# Altium PCB ha_sensor.PcbDoc
Units mm, origin at the board's own origin, x right, y up, seen from the top; angles counter-clockwise.
Board outline 65 x 45 mm, 4 copper layers (Top Layer, Int1 (GND), Int2 (PWR), Bottom Layer), stack 1.585 mm thick; 59 components, 30 nets, 141 pads, 36 vias.
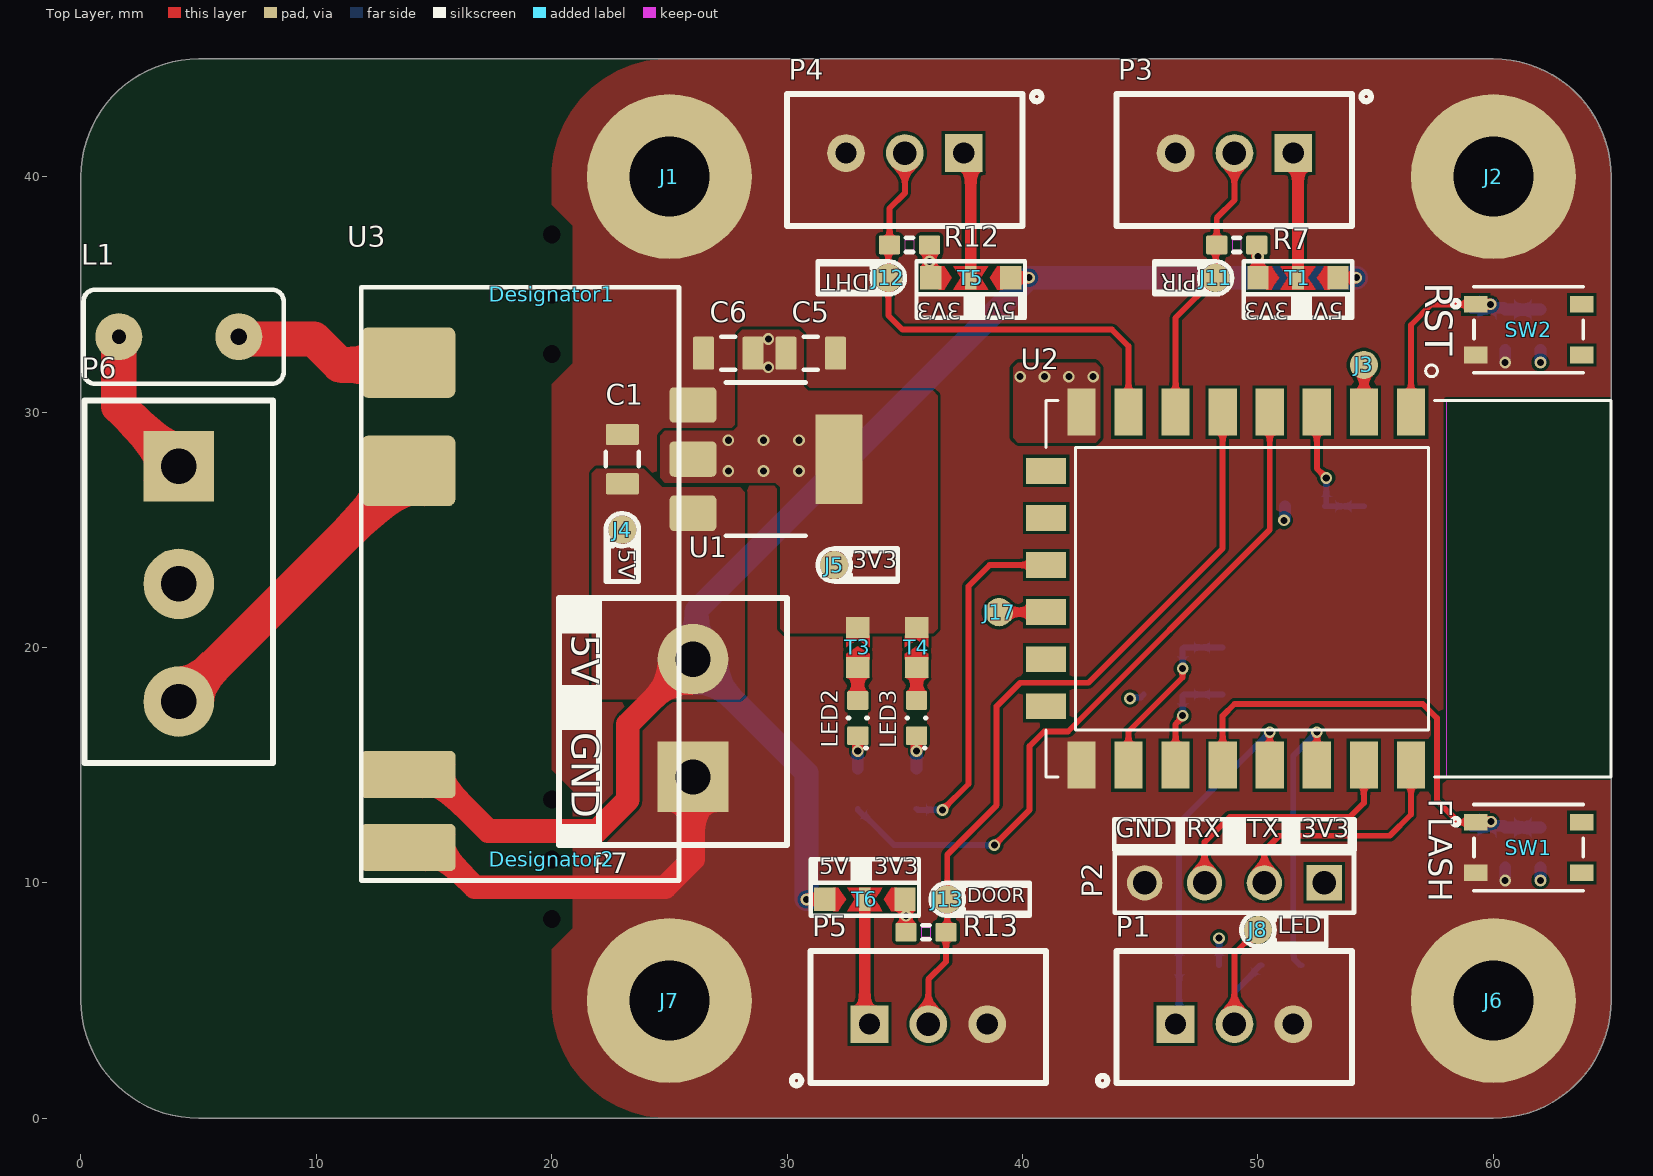
[diagram p0: Top Layer view]
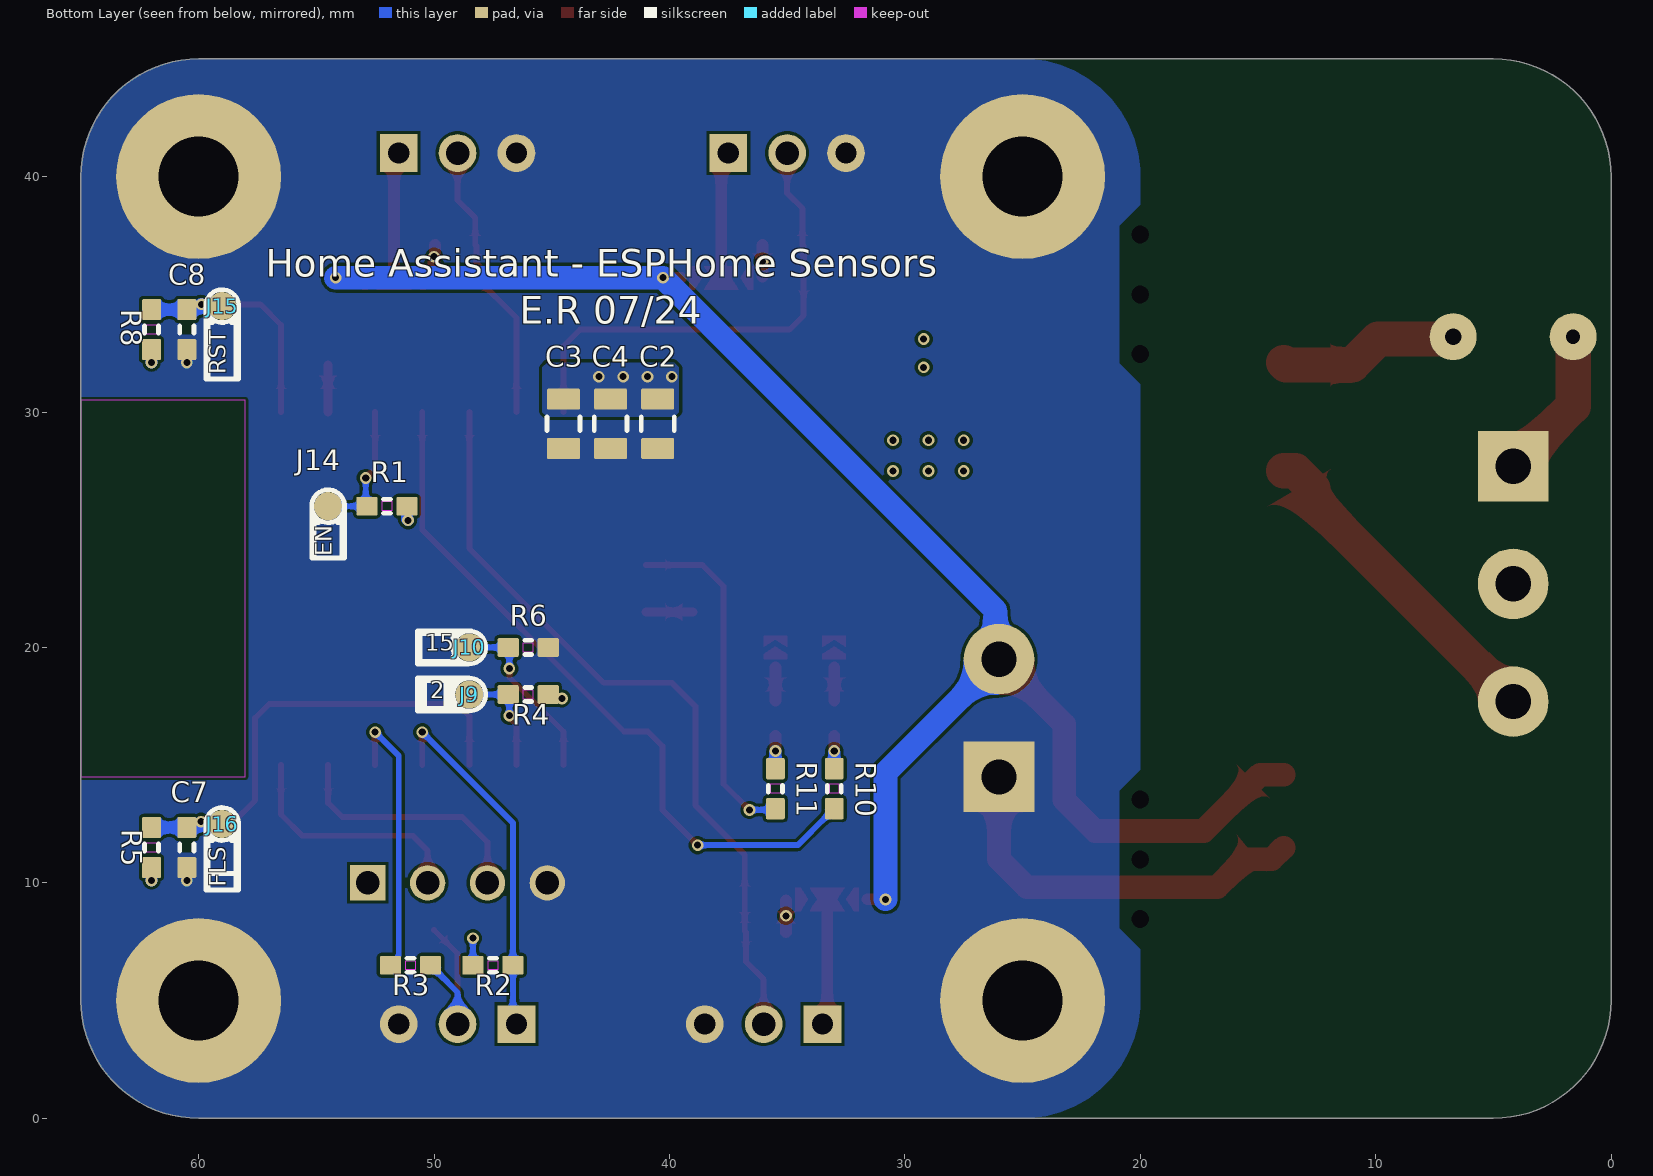
[diagram p1: Bottom Layer view, seen from below]
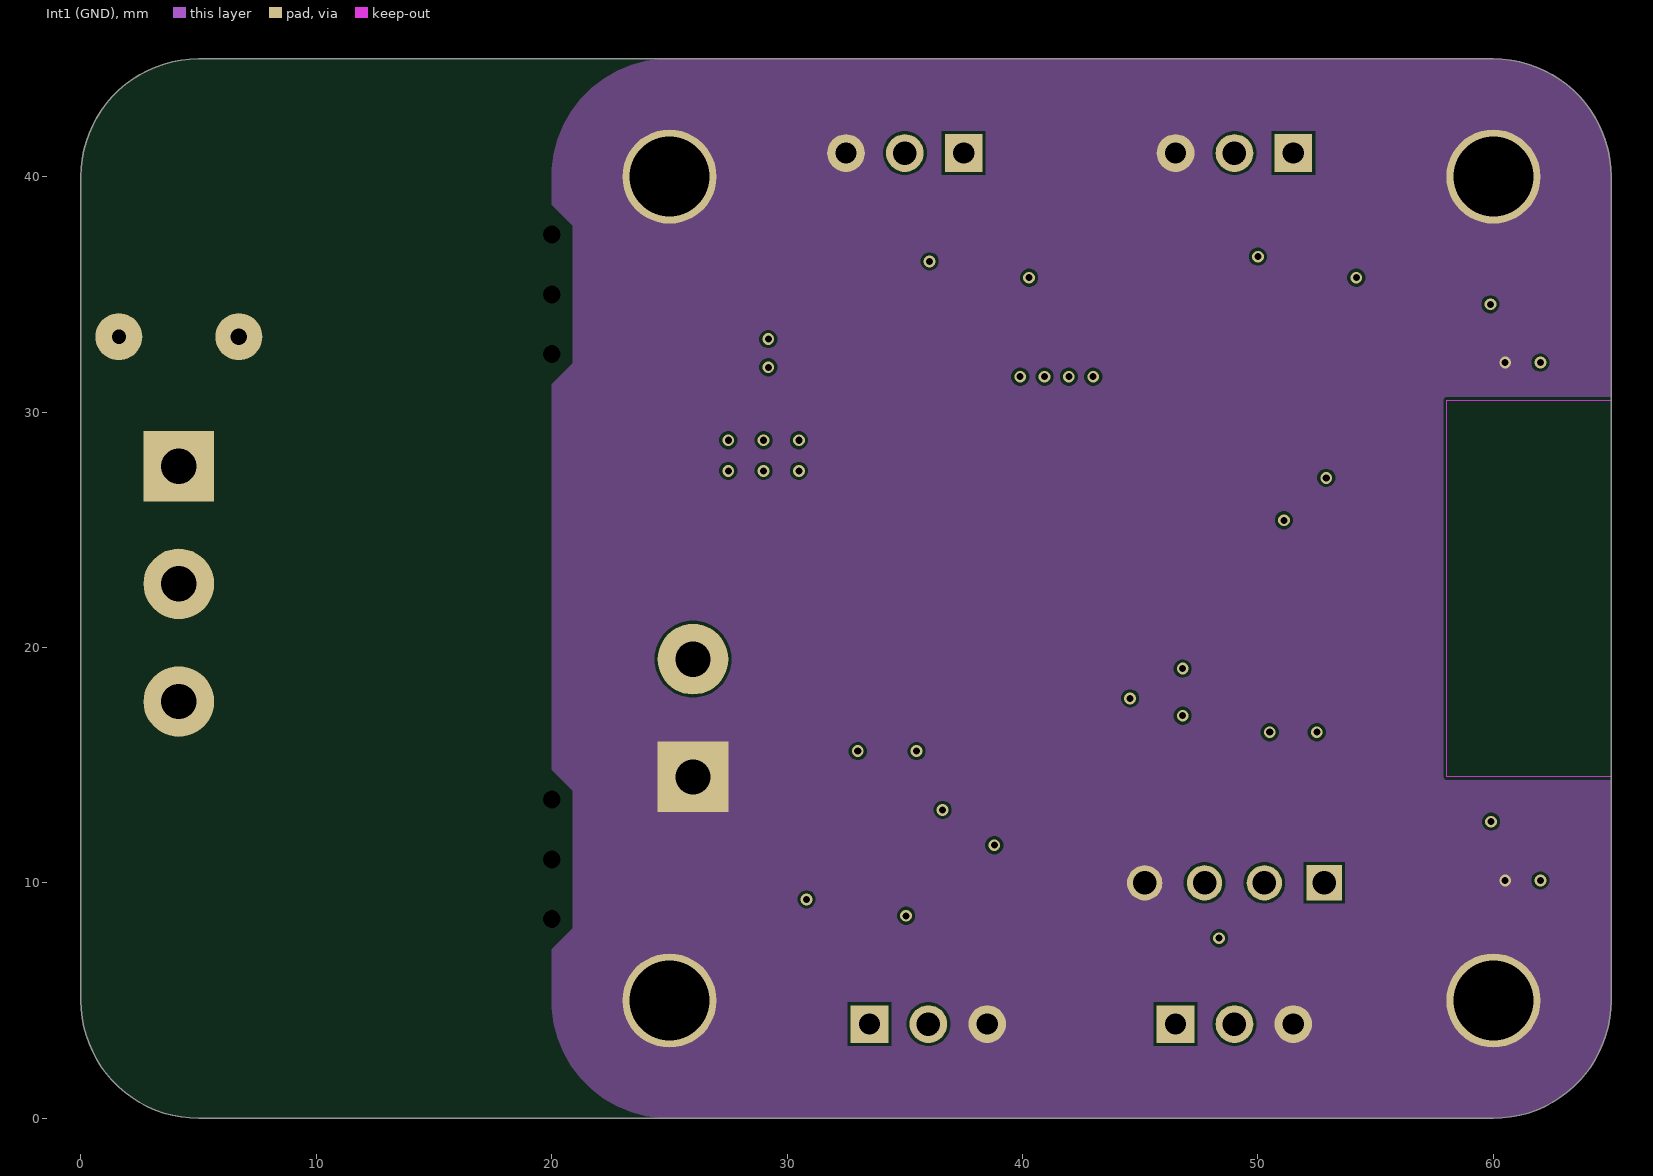
[diagram p2: Int1 (GND)]
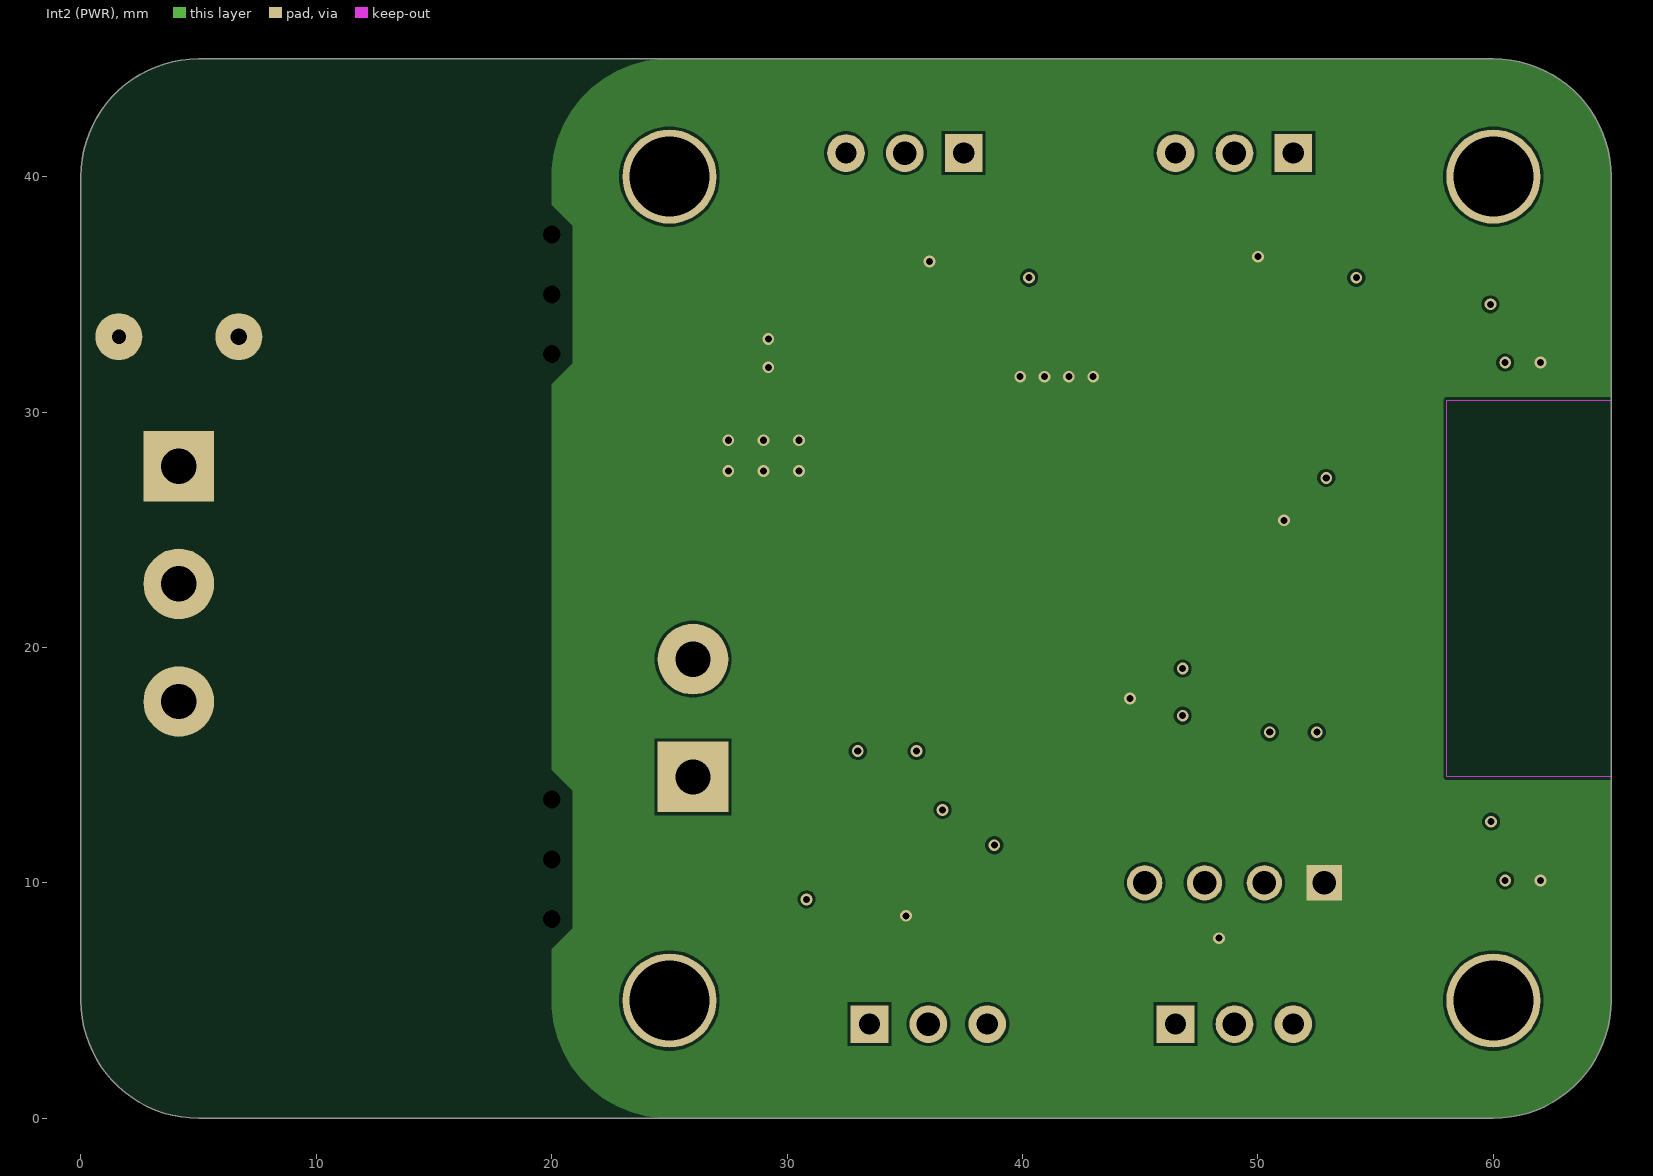
[diagram p3: Int2 (PWR)]
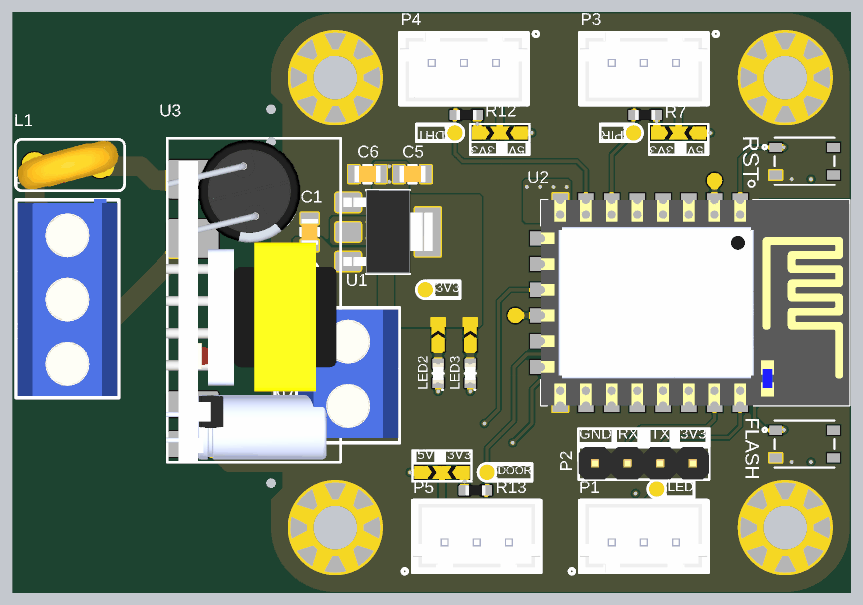
[diagram p4: 3D render of the assembled board from above, using the file's embedded part models]
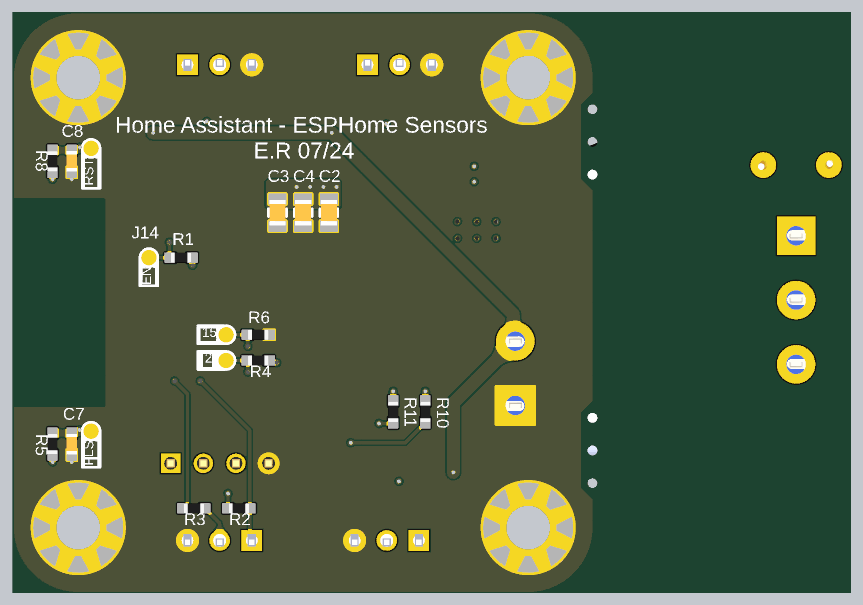
[diagram p5: 3D render of the assembled board from below, using the file's embedded part models]

## Layer stack, top to bottom
Top Solder: solder mask 0.035, SM-001, Dk 4
Top Layer: signal copper 0.035
Dielectric 2: prepreg 0.21, PP-017, Dk 4.6
Int1 (GND): signal copper 0.015
Dielectric 3: core 1.065, Core-039, Dk 4.6
Int2 (PWR): signal copper 0.015
Dielectric 4: prepreg 0.21, PP-017, Dk 4.6
Bottom Layer: signal copper 0.035
Bottom Solder: solder mask 0.035, SM-001, Dk 4

## Board outline
0,5 ccw(c5,5) 5,0 60,0 ccw(c60,5) 65,5 65,40 ccw(c60,40) 60,45 25,45 5,45 ccw(c5,40) 0,40

## Design rules (kind name [scope] priority, off if disabled: settings)
Clearance Clearance_Power [InNetClass('AC')] p1: gap=1 ignorepadtopadclearanceinfootprint=FALSE
Clearance Clearance_signal [All] p2: gap=0.125 ignorepadtopadclearanceinfootprint=FALSE
ComponentClearance [All] p1 off: gap=0.254 collisioncheckmode=3 verticalgap=0.254 showdistances=FALSE
HoleSize [All] p1 off: absolutevalues=TRUE maxlimit=2.54 minlimit=0.025 maxpercent=80.000 minpercent=20.000
MinimumSolderMaskSliver [All] p1 off: minsoldermaskwidth=0.254
PasteMaskExpansion [All] p1 off: expansion=0
PolygonConnect PolygonConnect_Power [InNetClass('Power')] p1: connectstyle=Direct reliefconductorwidth=0.254 reliefentries=4 polygonreliefangle="90 Angle" airgapwidth=0.254
PolygonConnect [All] p2: connectstyle=Direct reliefconductorwidth=0.254 reliefentries=4 polygonreliefangle="90 Angle" airgapwidth=0.254
RoutingVias [All] p1: holewidth=0.3 width=0.5 viastyle="Through Hole" minholewidth=0.15 minwidth=0.25 maxholewidth=1 maxwidth=1.3
SilkToSolderMaskClearance [IsPad] p1 off: minsilkscreentomaskgap=0.254 clearancetoexposedcopper=TRUE
SolderMaskExpansion [All] p1 off: expansion=0.102 istentingtop=FALSE
Width Width_Power(5A) [InNetClass('AC')] p1: maxlimit=3 minlimit=0.5 preferedwidth=2
Width Width_signal [All] p2: maxlimit=1 minlimit=0.1 preferedwidth=0.2 minimp=50.000000 maximp=50.000000 favimp=50.000000
25 further rules are at their usual default settings.

## Classes and differential pairs
net class AC: NetL1_1 NetL1_2 NetP6_3

## Components (designator, comment, footprint, x,y, rotation, side; value= is the part's Value field where it differs from the comment)
C1 "Capacitor-0805-10uF-35V-X5R" CAPACITOR-0805 23,28 r270 top value=10uF
C2 "Capacitor-0805-10uF-35V-X5R" CAPACITOR-0805 40.5,29.5 r90 bottom value=10uF
C3 "Capacitor-0805-22uF-16V-X5R" CAPACITOR-0805 44.5,29.5 r90 bottom value=22uF
C4 "Capacitor-0805-22uF-16V-X5R" CAPACITOR-0805 42.5,29.5 r90 bottom value=22uF
C5 "Capacitor-0805-10uF-16V-X5R" CAPACITOR-0805 31,32.5 r180 top value=10uF
C6 "Capacitor-0805-10uF-16V-X5R" CAPACITOR-0805 27.5,32.5 r0 top value=10uF
C7 "Capacitor-0603-1uF-25V-X5R" CAPACITOR-0603 60.5,11.5 r90 bottom value=1uF
C8 "Capacitor-0603-1uF-25V-X5R" CAPACITOR-0603 60.5,33.5 r90 bottom value=1uF
Designator1 "Comment" MOUSEBITES_100MIL_5-HOLES 18.603,35 r270 top locked
Designator2 "Comment" MOUSEBITES_100MIL_5-HOLES 18.603,11 r270 top locked
J1 "hole" HOLE-3.40MM-M3-7MMEYELET-MountingFeature 25,40 r0 top
J2 "hole" HOLE-3.40MM-M3-7MMEYELET-MountingFeature 60,40 r0 top
J3 "hole" PAD-0.53MM#1 54.5,32 r0 top
J4 "hole" PAD-0.53MM#1 23,25 r0 top
J5 "hole" PAD-0.53MM#1 32,23.5 r0 top
J6 "hole" HOLE-3.40MM-M3-7MMEYELET-MountingFeature 60,5 r0 top
J7 "hole" HOLE-3.40MM-M3-7MMEYELET-MountingFeature 25,5 r0 top
J8 "hole" PAD-0.53MM#1 50,8 r0 top
J9 "hole" PAD-0.53MM#2 48.5,18 r0 top
J10 "hole" PAD-0.53MM#2 48.5,20 r90 top
J11 "hole" PAD-0.53MM#1 48.2,35.7 r0 top
J12 "hole" PAD-0.53MM#1 34.3,35.7 r90 top
J13 "hole" PAD-0.53MM#1 36.8,9.3 r90 top
J14 "hole" PAD-0.53MM#1 54.5,26 r90 bottom
J15 "hole" PAD-0.53MM#1 59,34.5 r90 bottom
J16 "hole" PAD-0.53MM#1 59,12.5 r90 bottom
J17 "hole" PAD-0.53MM#1 39,21.5 r90 top
L1 "0ZRE0016FF1C" 0ZRE0016FF1C-PTC 4.16,33.2 r0 top
LED2 "B1911USD-20D000114U1930" LED-0603-2PIN 33,17 r90 top
LED3 "B1911USD-20D000114U1930" LED-0603-2PIN 35.5,17 r90 top
P1 "Button" JST_XH_3_Pos 46.5,4 r0 top
P2 "UART" HDR1X4 49,10 r180 top
P3 "PIR" JST_XH_3_Pos 51.5,41 r180 top
P4 "DHT" JST_XH_3_Pos 37.5,41 r180 top
P5 "Door" JST_XH_3_Pos 33.5,4 r0 top
P6 "3pos-TH-5.0mm" "Weco 3" 4.16,27.7 r270 top
P7 "2pos-TH-5.0mm" "Weco 2" 26,17 r90 top
R1 "SMT resistor" Resistor-0603 52,26 r180 bottom value=10k
R2 "SMT resistor" Resistor-0603 47.5,6.5 r0 bottom value=10k
R3 "SMT resistor" Resistor-0603 51,6.5 r0 bottom value=1k
R4 "SMT resistor" Resistor-0603 46,18 r180 bottom value=10k
R5 "SMT resistor" Resistor-0603 62,11.5 r270 bottom value=10k
R6 "SMT resistor" Resistor-0603 46,20 r0 bottom value=10k
R7 "SMT resistor" Resistor-0603 49.1,37.1 r0 top value=DNI
R8 "SMT resistor" Resistor-0603 62,33.5 r270 bottom value=10k
R10 "SMT resistor" Resistor-0603 33,14 r90 bottom value=1k
R11 "SMT resistor" Resistor-0603 35.5,14 r90 bottom value=1k
R12 "SMT resistor" Resistor-0603 35.2,37.1 r0 top value=DNI
R13 "SMT resistor" Resistor-0603 35.9,7.9 r180 top value=DNI
SW1 "PTS815 SJM 250 SMTR LFS" "SW4_PTS815 SJM 250 SMTR LFS_CNK" 61.5,11.5 r90 top
SW2 "PTS815 SJM 250 SMTR LFS" "SW4_PTS815 SJM 250 SMTR LFS_CNK" 61.5,33.5 r90 top
T1 "Jumper-3pos-small" Jumper-3pos-small 51.7,35.7 r0 top
T3 "NetTie_0603_Short" NetTie-0603-short 33,20 r270 top
T4 "NetTie_0603_Short" NetTie-0603-short 35.5,20 r270 top
T5 "Jumper-3pos-small" Jumper-3pos-small 37.8,35.7 r0 top
T6 "Jumper-3pos-small" Jumper-3pos-small 33.3,9.3 r180 top
U1 "NCP1117ST15T3G" SOT-223-3/TO-261-3S 26,28 r270 top
U2 "ESP8266-12E" ESP8266-12E 49.5,22.5 r270 top
U3 "WX-DC12003" WX-DC12003 18.66,22.7 r90 top

## Footprints (in the part's own frame and the unit in brackets; to place one, negate y for a bottom-side part, rotate by r counter-clockwise, add the part's x,y. Pads: shape width x height; smd on the part's side, far side on the other; paste and mask are expansions set on the pad)
0ZRE0016FF1C-PTC [mm]
  round 2 hole 0.6: 1(-2.55,0)
  round 2 hole 0.7: 2(2.55,0)
  silkscreen extent -4.05,-2 4.45,2, body extent -4.13,-2.25 4.23,2.25, height 8.99
CAPACITOR-0603 [mm] "Metric 1608, EIA 0603. Per Yageo Product Specification V2.2"
  rrect15% 0.9x0.8 smd: 1(-0.85,0) 2(0.85,0)
  Top Layer pour cut-out: -0.2,0.2 0.2,0.2 0.2,-0.2 -0.2,-0.2
  silkscreen extent -0.15,-0.3 0.15,0.3, body extent -0.93,-0.41 0.93,0.41, height 0.81
CAPACITOR-0805 [mm] "Metric 2012, EIA 0805, Per Yageo Product Specification V2.2"
  rrect15% 0.9x1.4 smd: 1(-1.05,0) 2(1.05,0)
  silkscreen extent -0.3,-0.7 0.3,0.7, body extent -1.09,-0.64 1.09,0.64, height 1.26
ESP8266-12E [mm]
  rect 2x1.2 smd: 1(-7.5,7) 2(-7.5,5) 3(-7.5,3) 4(-7.5,1) 5(-7.5,-1) 6(-7.5,-3) 7(-7.5,-5) 8(-7.5,-7) 15(7.5,-7) 16(7.5,-5) 17(7.5,-3) 18(7.5,-1) 19(7.5,1) 20(7.5,3) 21(7.5,5) 22(7.5,7)
  rect 1.1x1.7 smd: 9(-5,-8.5) 10(-3,-8.5) 11(-1,-8.5) 12(1,-8.5) 13(3,-8.5) 14(5,-8.5)
  Keep-Out Layer region: 8,8.51 -8.009,8.51 -8.009,15.5 8,15.5
  Keep-Out Layer region: 8,8.51 -8.009,8.51 -8.009,15.5 8,15.5
  silkscreen extent -9.5,-8.5 8,15.5, body extent -8,-8.51 8,15.49, height 3
HDR1X4 [mm] "Connector; Header; 2 Position"
  rect 1.5x1.5 hole 1: 1(-3.81,0)
  round 1.5 hole 1: 2(-1.27,0) 3(1.27,0) 4(3.81,0)
  silkscreen extent -5.08,-1.27 5.08,1.27, body extent -5.08,-1.27 5.08,1.27, height 8.54
HOLE-3.40MM-M3-7MMEYELET-MountingFeature [mm] "Hole 3.40mm with round pad for eyelet"
  round 7 / inner round 4 / far side round 7 hole 3.4 mask+0.2: 1(0,0)
JST_XH_3_Pos [mm]
  rect 1.6x1.6 hole 0.9: 1(0,0)
  round 1.6 hole 1: 2(2.5,0)
  round 1.6 hole 0.9: 3(5,0)
  silkscreen extent -3.3,-2.6 7.5,3.1, body extent -2.45,-2.5 7.45,3.25, height 7
Jumper-3pos-small [mm] "3 pos selection"
  rect 0.9x1 smd paste-1 mask+0.102: 1(-1.7,0) 2(1.7,0)
  rect 0.5x1 smd paste-1 mask+0.102: 3(0,0)
  Top Layer region: 0,0.5 0.75,0.5 0.625,0.3 0.425,0 0.625,-0.3 0.75,-0.5 0,-0.5
  Top Layer region: 1.35,0.5 1.125,0.5 1,0.3 0.8,0 1,-0.3 1.125,-0.5 1.35,-0.5
  Top Layer region: 0,0.5 -0.75,0.5 -0.625,0.3 -0.425,0 -0.625,-0.3 -0.75,-0.5 0,-0.5
  Top Layer region: -1.35,0.5 -1.125,0.5 -1,0.3 -0.8,0 -1,-0.3 -1.125,-0.5 -1.35,-0.5
  silkscreen extent -2.3,-0.7 2.3,0.7
LED-0603-2PIN [mm] "Metric 1608, EIA 0603. Per Yageo Product Specification V2.2"
  rrect15% 0.8x0.9 smd: 1(-0.75,0) 2(0.75,0)
  Top Layer pour cut-out: -0.35,0.45 0.35,0.45 0.35,-0.45 -0.35,-0.45
  silkscreen extent -1.28,-0.41 0,0.41, body extent -0.8,-0.4 0.8,0.4, height 0.8
MOUSEBITES_100MIL_5-HOLES [mil] "Mousebites - 100 mils router - 5 holes (30mils)"
  round 0 hole 30 unplated mask+4: 0(-100,55) 0(0,55) 0(100,55)
  Multi-Layer pour cut-out: -115,90 115,90 155,50 155,0 -150,0 -150,55
NetTie-0603-short [mm] "Net Tie with an EIA 0603 land pattern"
  rect 0.9x1 smd paste-1 mask+0.102: 1(-0.85,0) 2(0.85,0)
  Top Layer region: -0.5,0.5 0,0.5 -0.125,0.3 -0.325,0 -0.125,-0.3 0,-0.5 -0.5,-0.5
  Top Layer region: 0.5,0.5 0.275,0.5 0.15,0.3 -0.05,0 0.15,-0.3 0.275,-0.5 0.5,-0.5
PAD-0.53MM#1 [mm] "Hole 0.53mm"
  round 1.2 smd paste-2539.97: 1(0,0)
PAD-0.53MM#2 [mm] "Hole 0.53mm"
  round 1.2 smd far side paste-2539.97: 1(0,0)
Resistor-0603 [mm] "Metric 1608, EIA 0603 Drawn per Yageo \"Chip resistors Mounting\" rev 10"
  rrect15% 0.9x0.8 smd: 1(-0.85,0) 2(0.85,0)
  Top Layer pour cut-out: -0.2,0.2 0.2,0.2 0.2,-0.2 -0.2,-0.2
  Top Layer keep-out region: -0.2,0.2 0.2,0.2 0.2,-0.2 -0.2,-0.2
  silkscreen extent -0.15,-0.3 0.15,0.3, body extent -0.8,-0.4 0.8,0.4, height 0.55
SOT-223-3/TO-261-3S [mm] "TO-261-3 / SOT-223-3 from Infineon IPN80R600P7 Datasheet, rev 2,1"
  rrect25% 1.5x2 smd: 1(-2.3,0) 2(0,0) 3(2.3,0)
  rrect5% 3.8x2 smd: 4(0,6.2)
  silkscreen extent -3.25,1.4 3.25,4.78, body extent -3.25,-0.37 3.25,6.57, height 1.64
"SW4_PTS815 SJM 250 SMTR LFS_CNK" [mm]
  rect 0.711x0.991 smd paste+0: 1(1.075,2.25) 2(1.075,-2.25) 3(-1.075,2.25) 4(-1.075,-2.25)
  silkscreen extent -1.83,-2.32 1.83,3.25, body extent -1.83,-2.32 1.83,2.32, height 3
"Weco 2" [mm]
  rect 3x3 hole 1.5: 1(-2.5,0)
  round 3 hole 1.5: 2(2.5,0)
  silkscreen extent -5.4,-4 5.1,4, body extent -5.37,-3.9 4.96,3.9, height 10.18
"Weco 3" [mm]
  rect 3x3 hole 1.5: 1(0,0)
  round 3 hole 1.5: 2(5,0) 3(10,0)
  silkscreen extent -2.79,-4 12.6,4, body extent -2.87,-3.9 12.46,3.9, height 10.18
WX-DC12003 [mm]
  rrect20% 3x4 smd: 1(9.4,4.75) 2(4.8,4.75)
  rrect20% 2x4 smd: 3(-8.1,4.75) 4(-11.2,4.75)
  silkscreen extent -12.6,-6.75 12.6,6.75, body extent -12.67,-6.45 12.47,6.85, height 18.55

## Part data
C1 C2: Package / Case="Metric 2012 , EIA 0805", Supplier Part Number 1=490-10515-1-ND, Volt=35V, Mounted=Yes, Precision=X5R-10%, Supplier 1=Digi-Key, Supplier 2=Digi-Key, Supplier 3=Digi-Key, Supplier 4=Digi-Key
C3 C4: Package / Case="Metric 2012 , EIA 0805", Supplier Part Number 1=1276-6780-1-ND, Volt=16V, Mounted=Yes, Precision=X5R-10%, Supplier 1=Digi-Key, Supplier 2=Digi-Key
C5 C6: Package / Case="Metric 2012 , EIA 0805", Supplier Part Number 1=1276-1096-2-ND, Volt=16V, Mounted=Yes, Precision=X5R-10%, Supplier 1=Digi-Key, Supplier 2=Digi-Key
C7 C8: Package / Case="Metric 1608, EIA 0603", Supplier Part Number 1=1276-1859-2-ND, Volt=25V, Mounted=Yes, Precision=X5R-10%, Supplier 1=Digi-Key, Supplier 2=Digi-Key, Supplier 3=Digi-Key, Supplier 4=Digi-Key, Supplier Part Number 2=1276-1942-2-ND
J1 J2 J6 J7: library part "Hole 3.40mm M3-MountingFeature", "Hole for M3 Bolt with 7mm pad", Mounted=N/A
J3 J4 J5 J8 J9 J10 J11 J12 J13 J14 J15 J16 J17: library part "PAD 0.53mm AWG28-Solid", "PAD for 28 AWG Solid Wire", Mounted=N/A
L1: "PTC RESET FUSE 240V 160MA RADIAL", Current=5A, Package / Case=SMD, Supplier Part Number 1=308-2498-1-ND, Mounted=Yes, Precision=20%, Supplier 1=Digi-Key
LED2 LED3: "LED RED CLEAR 0603 SMD", Package / Case="0603 (1608 Metric)", Supplier Part Number 1=3147-B1911USD-20D000114U1930CT-ND, Mounted=Yes, Supplier 1=Digi-Key
P1 P3 P4 P5: library part JST_XH_3_Pos, "CONN HEADER VERT 3POS 2.5MM", Package / Case=TH, Supplier Part Number 1=455-2248-ND, Volt=N/A, Mounted=Yes, Supplier 1=Digi-Key
P2: library part 4pos-TH-2.54mm, "4pos TH 2.54mm Header", Package / Case=TH, Supplier Part Number 1=N/A, Mounted=Yes, Supplier 1=Digi-Key, Volt=N/A
P6: library part 3P-TH-5.0mm, "3pos-TH-5.0mm Screw Terminal", Package / Case=TH, Supplier Part Number 1=277-1667-ND, Volt=N/A, Mounted=Yes, Supplier 1=Digi-Key
P7: library part 2P-TH-5.0mm, "2pos-TH-5.0mm Screw Terminal", Package / Case=TH, Supplier Part Number 1=N/A277-1667-ND, Volt=N/A, Mounted=Yes, Supplier 1=Digi-Key
R1 R2 R4 R6 R7 R12 R13: library part Resistor-0603-10k, "Resistor0603-10k", Package / Case="Metric 1608, EIA 0603", Supplier Part Number 1=311-10.0KHRTR-ND, Mounted=Yes, Precision=1%, Supplier 1=Digi-Key, Watt=0.1W
R3 R10 R11: library part Resistor-0603-1k, "Resistor0603-1k", Package / Case="Metric 1608, EIA 0603", Supplier Part Number 1=311-1.00KHRCT-ND, Mounted=Yes, Precision=1%, Supplier 1=Digi-Key, Watt=0.1W
R5 R8: library part Resistor0603-10k, "Resistor0603-10k", Package / Case="Metric 1608, EIA 0603", Supplier Part Number 1=311-10.0KHRTR-ND, Mounted=Yes, Precision=1%, Supplier 1=Digi-Key, Supplier 2=Digi-Key, Supplier 3=Digi-Key, Supplier 4=Digi-Key, Supplier Part Number 2=RMCF0603FT10K0TR-ND, Watt=0.1W
SW1 SW2: "TACT 4.2 X 3.2, 2.5 MM H, 180GF,", Current=0.05A, Supplier Part Number 1=CKN12215-1-ND, Volt=12V, Mounted=Yes, Supplier 1=Digi-Key
U1: "IC REG LINEAR 3.3V 1A SOT223", Package / Case=SOT223, Supplier Part Number 1=NCV1117ST33T3GOSCT-ND, Mounted=Yes, Supplier 1=Digi-Key
U3: "AC/DC Isolated converter. 50-277AC -> 5Vdc", Grade=None, HelpURL=https://www.aerial.net/shop/product/54_250/2321/85265v-ac-to-5v.html, Supplier 1=Aliexpress, Supplier Part Number 1=WX-DC12003

## Via types
v1: diameter 0.5, hole 0.3, Top Layer to Bottom Layer, tented both sides, 36 vias

## Nets (pads, with @x,y where several pads share a name; then routed paths per layer and width w, separated by ;. In a path a pad name is that pad's centre, name@x,y a point inside that pad or via, vN(x,y) a via of type N, cw(c..) or ccw(c..) an arc to the next point about the centre after c; other vN are vias at no path point)
5V: C1.2 J4.1 P7.2 T1.2 T5.2 T6.2 U1.3 U3.3 | length 68.5
  Top Layer w0.5: v1(30.823,9.294) 30.828,9.3 T6.2 ; T5.2 40.272,35.7 v1(40.277,35.706) ; T1.2 54.172,35.7 v1(54.177,35.706)
  Top Layer w1: U3.3 14.91,14.6 17.308,12.202 21.909,12.202 23.235,13.528 23.235,16.735 P7.2
  Bottom Layer w1: v1(30.823,9.294) 30.823,14.677 P7.2 26.157,19.657 26.157,21.586 v1(40.277,35.706) v1(54.177,35.706)
+3.3: C2.2 C3.2 C4.2 C5.2 C6.2 J5.1 P2.1 R1.2 R2.2 R4.2 R5.2 R7.2 R8.2 R12.2 R13.2 T1.1 T3.1 T4.1 T5.1 T6.1 U1.2 U1.4 U2.8 | length 7.8
  Top Layer w0.25: T6.1 T6.1@35.05,9.25 ; T5.1@36.05,35.75 T5.1 ; T1.1@49.95,35.75 T1.1
  Top Layer w0.5: R13.2 T6.1@35.05,9.25 ; T5.1@36.05,35.75 R12.2 ; T1.1@49.95,35.75 50,35.8 v1(50,36.6) 49.957,36.643 49.957,37.093 R7.2
  Bottom Layer w0.25: v1(44.566,17.834) 44.614,17.881 45.031,17.881 R4.2 ; R2.2 v1(48.35,7.65)
  Bottom Layer w0.5: v1(51.1,25.4) 51.15,25.45 R1.2 ; v1(62,10.1) R5.2 ; v1(62,32.1) R8.2
  other v1: 35.05,8.6 27.5,27.5 29,27.5 30.5,27.5 27.5,28.8 29,28.8 30.5,28.8 39.9,31.5 40.933,31.5 41.967,31.5 43,31.5 29.2,31.9 29.2,33.1 36.05,36.4
Button: P1.1 R2.1 U2.19 | length 15.5
  Top Layer w0.25: U2.19 v1(50.5,16.4)
  Bottom Layer w0.25: P1.1@46.65,4.15 R2.1 46.65,12.55 v1(50.5,16.4)
  Bottom Layer w0.5: P1.1 P1.1@46.65,4.15
Button_LED: R3.2 U2.20 | length 11.9
  Top Layer w0.25: U2.20 v1(52.5,16.4)
  Bottom Layer w0.25: R3.2 51.8,6.5 51.525,6.775 51.525,6.896 51.5,6.921 51.5,15.4 v1(52.5,16.4)
DHT: J12.1 P4.2 R12.1 U2.7 | length 20.7
  Top Layer w0.25: P4.2 35,39.3 34.35,38.65 R12.1 34.3,37.05 J12.1 34.3,34.1 34.9,33.5 43.8,33.5 44.5,32.8 U2.7
Door: J13.1 P5.2 R13.1 U2.5 | length 32.9
  Top Layer w0.25: P5.2 36,5.9 36.75,6.65 R13.1 36.8,7.95 J13.1 36.8,11.2 38.9,13.3 38.9,17.5 39.9,18.5 42.8,18.5 48.5,24.2 U2.5
EN: J14.1 R1.1 U2.3 | length 5.8
  Top Layer w0.25: U2.3 52.5,27.6 v1(52.9,27.2)
  Bottom Layer w0.25: v1(52.9,27.2) 52.9,26.05 R1.1 J14.1
FLASH: C7.2 J16.1 R5.1 SW1.1 U2.18 | length 20.9
  Top Layer w0.25: U2.18 48.5,17.1 49,17.6 57,17.6 57.6,17 57.6,13.5 58.525,12.575 SW1.1
  Top Layer w0.5: SW1.1 59.275,12.6 v1(59.9,12.6)
  Bottom Layer w0.5: J16.1 59.075,12.425 60.425,12.425 C7.2 R5.1
GND: C1.1 C2.1 C3.1 C4.1 C5.1 C6.1 C7.1 C8.1 J1.1 J2.1 J6.1 J7.1 P1.3 P2.4 P3.3 P4.3 P5.3 P7.1 R6.1 SW1.3 SW2.3 U1.1 U2.15 U3.4 | length 17.9
  Top Layer w1: U3.4 14.41,11 15.549,11 16.734,9.815 24.815,9.815 26,11 P7.1
  Bottom Layer w0.5: v1(60.5,10.1) C7.1 ; v1(60.5,32.1) C8.1
IO2: J9.1 R4.1 U2.17 | length 4.8
  Top Layer w0.25: U2.17 46.5,16.732 46.8,17.032 v1(46.8,17.1)
  Bottom Layer w0.25: v1(46.8,17.1) 46.8,17.95 R4.1 J9.1
IO15: J10.1 R6.2 U2.16 | length 7.6
  Top Layer w0.25: U2.16 44.5,16.431 46.792,18.724 46.792,19.092 v1(46.8,19.1)
  Bottom Layer w0.25: v1(46.8,19.1) 46.8,19.95 R6.2 J10.1
LED1: R11.1 U2.11 | length 14.7
  Top Layer w0.25: v1(36.6,13.1) 37.7,14.2 37.7,22.6 38.6,23.5 U2.11
  Bottom Layer w0.25: R11.1 35.55,13.1 v1(36.6,13.1)
LED2: R10.1 U2.4 | length 30.3
  Top Layer w0.25: v1(38.8,11.6) 40.3,13.1 40.3,15.81 40.922,16.432 41.932,16.432 50.5,25 U2.4
  Bottom Layer w0.25: R10.1 33,13.1 33.275,12.825 33.325,12.825 34.55,11.6 v1(38.8,11.6)
NetJ3_1: J3.1 U2.2 | length 2
  Top Layer w0.381: U2.2 J3.1
NetJ8_1: J8.1 P1.2 R3.1 | length 7.4
  Top Layer w0.25: P1.2 49,7 J8.1
  Bottom Layer w0.25: P1.2 49,5.35 49.825,6.175 49.825,6.225 50.1,6.5 R3.1
NetJ17_1: J17.1 U2.12 | length 2
  Top Layer w0.381: J17.1 U2.12
NetL1_1: L1.1 P6.1 | length 6.6
  Top Layer w1.5: L1.1 1.61,30.25 P6.1
NetL1_2: L1.2 U3.1 | length 7.7
  Top Layer w1.5: L1.2 6.806,33.104 9.896,33.104 11,32 13.81,32 U3.1
NetLED2_1: LED2.1 R10.2 | length 1.4
  Top Layer w0.5: v1(33,15.6) LED2.1
  Bottom Layer w0.5: R10.2 v1(33,15.6)
NetLED2_2: LED2.2 T3.2 | length 1.4
  Top Layer w0.5: LED2.2 T3.2
NetLED3_1: LED3.1 R11.2 | length 1.4
  Top Layer w0.5: v1(35.5,15.6) LED3.1
  Bottom Layer w0.5: R11.2 v1(35.5,15.6)
NetLED3_2: LED3.2 T4.2 | length 1.4
  Top Layer w0.5: LED3.2 T4.2
NetP3_1: P3.1 T1.3 | length 5.4
  Top Layer w0.5: P3.1 51.7,40.8 T1.3
NetP4_1: P4.1 T5.3 | length 5.4
  Top Layer w0.5: P4.1 37.8,40.7 T5.3
NetP5_1: P5.1 T6.3 | length 5.4
  Top Layer w0.5: T6.3 33.3,4.2 P5.1
NetP6_3: P6.3 U3.2 | length 14.1
  Top Layer w1.5: P6.3 12.66,26.2 12.66,26.75 13.41,27.5 U3.2
PIR: J11.1 P3.2 R7.1 U2.6 | length 12
  Top Layer w0.25: U2.6 46.5,34 J11.1 48.2,37.05 R7.1 48.25,38.25 49,39 P3.2
RST: C8.2 J15.1 R8.1 SW2.1 U2.1 | length 10.5
  Top Layer w0.25: U2.1 56.5,33.7 57.375,34.575 SW2.1
  Top Layer w0.5: SW2.1 v1(59.875,34.575)
  Bottom Layer w0.5: J15.1 59.075,34.425 60.425,34.425 C8.2 R8.1 ; v1(59.875,34.575) v1@59.9,34.6
RX: P2.3 U2.21 | length 10.8
  Top Layer w0.25: P2.3 47.73,11.73 48.8,12.8 53.9,12.8 54.5,13.4 U2.21
TX: P2.2 U2.22 | length 10.3
  Top Layer w0.25: P2.2 50.27,11.37 50.9,12 55.6,12 56.5,12.9 U2.22
pads on no net: Designator1.0 Designator2.0 P6.2 SW1.2 SW1.4 SW2.2 SW2.4 U2.9 U2.10 U2.13 U2.14

## Polygon pours and split planes (outlines as drawn)
GND on Top Layer "GND_L01_P006" (solid, remove dead copper, pour order 6): 20,5 ccw(c25,5) 25,0 60,0 ccw(c60,5) 65,5 65,40 ccw(c60,40) 60,45 25,45 ccw(c25,40) 20,40
+3.3 on Top Layer "+3.3_L01_P002" (solid, remove dead copper, pour order 2): 43.1,28.7 43.3,28.9 43.3,31.9 43.1,32.1 39.8,32.1 39.6,31.9 39.6,28.9 39.8,28.7
+3.3 on Top Layer "+3.3_L01_P001" (solid, remove dead copper, pour order 1): 29.5,27 29.7,26.8 29.7,20.8 29.9,20.6 36.2,20.6 36.4,20.8 36.4,30.7 36.2,30.9 30.9,30.9 30.7,31.1 30.7,33.3 30.5,33.5 28.1,33.5 27.9,33.3 27.9,29.4 27.7,29.2 24.8,29.2 24.6,29 24.6,27.2 24.8,27
5V on Top Layer "5V_L01_P000" (solid, remove dead copper, pour order 0): 23.9,27.6 24.7,26.8 28,26.8 28.2,26.6 28.2,18 28,17.8 21.9,17.8 21.7,18 21.7,27.4 21.9,27.6
GND on Bottom Layer "GND_L04_P005" (solid, remove dead copper, pour order 5): 20,5 ccw(c25,5) 25,0 60,0 ccw(c60,5) 65,5 65,40 ccw(c60,40) 60,45 25,45 ccw(c25,40) 20,40
+3.3 on Bottom Layer "+3.3_L04_P003" (solid, remove dead copper, pour order 3): 39.8,29.8 45.2,29.8 45.4,30 45.4,31.9 45.2,32.1 39.8,32.1 39.6,31.9 39.6,30 39.8,29.8
+3.3 on Int2 (PWR) "+3.3_L03_P007" (solid, remove dead copper, pour order 7): 20,5 ccw(c25,5) 25,0 60,0 ccw(c60,5) 65,5 65,40 ccw(c60,40) 60,45 25,45 ccw(c25,40) 20,40
GND on Int1 (GND) "GND_L02_P004" (solid, remove dead copper, pour order 4): 20,5 ccw(c25,5) 25,0 60,0 ccw(c60,5) 65,5 65,40 ccw(c60,40) 60,45 25,45 ccw(c25,40) 20,40

## Other copper
Top Layer:
  text "1-TOP" at 68.8,48.9 h2.5
Int1 (GND):
  text "2-GND1" at 68.8,44.545 h2.5
Int2 (PWR):
  text "3-PWR1" at 68.8,40.191 h2.5
Bottom Layer:
  text "4-BOTTOM" at 68.8,35.836 h2.5

## Silkscreen, mask and mechanical layers (free items; w line width, h text height)
Top Overlay:
  circle w0.2: c48.2,35.7 r0.7
  circle w0.2: c34.3,35.7 r0.7
  circle w0.2: c50,8 r0.7
  circle w0.2: c36.8,9.3 r0.7
  circle w0.2: c23,25 r0.7
  circle w0.2: c32,23.5 r0.7
  rectangle: 53.8,11.4 54.1,12.7
  rectangle: 20.4,11.7 21.9,12.5
  rectangle: 20.4,16.5 21.9,18.4
  rectangle: 20.4,20.6 21.9,22
  rectangle: 43.925,11.35 54.09,11.65
  rectangle: 51,11.3 51.8,12.675
  rectangle: 48.5,11.325 49.5,12.65
  rectangle: 46.5,11.3 46.9,12.625
  region: 52.3,35 51.4,35 51.4,34 52.3,34
  region: 54,35 53.7,35 53.7,34 54,34
  region: 38.4,35 37.5,35 37.5,34 38.4,34
  region: 40.1,35 39.8,35 39.8,34 40.1,34
  rectangle: 31,10 31.3,11
  rectangle: 32.7,10 33.6,11
  lines w0.18: 31,9.3 31,11 35.6,11 35.6,9.1 ; 35.5,35.9 35.5,34 40.1,34 40.1,35.7 ; 49.4,35.9 49.4,34 54,34 54,35.7
  lines w0.2: 22.3,24.9 22.3,22.8 23.7,22.8 23.7,25 ; 22.4,24.3 22.6,24.3 ; 23.4,24.3 23.6,24.3 ; 32,24.2 34.7,24.2 34.7,22.8 32.1,22.8 ; 32.7,22.9 32.7,23.1 ; 32.7,23.9 32.7,24.1 ; 33.6,35.1 33.6,35.3 ; 33.6,36.1 33.6,36.3 ; 34.2,36.4 31.3,36.4 31.3,35 34.3,35 ; 36.8,10 40.3,10 40.3,8.6 36.9,8.6 ; 37.5,8.7 37.5,8.9 ; 37.5,9.7 37.5,9.9 ; 43.92,10 43.9,12.7 54.1,12.7 54.08,10 ; 47.5,35.1 47.5,35.3 ; 47.5,36.1 47.5,36.3 ; 48.1,36.4 45.6,36.4 45.6,35 48.2,35 ; 50,8.7 52.9,8.7 52.9,7.3 50.1,7.3 ; 50.7,7.4 50.7,7.6 ; 50.7,8.4 50.7,8.6
  lines w0.22: 22.4,22.9 22.4,24.5 ; 23.6,22.9 23.6,24.4 ; 31.4,35.1 33.7,35.1 ; 31.4,36.3 33.8,36.3 ; 32.5,22.9 34.6,22.9 ; 32.6,24.1 34.6,24.1 ; 45.7,35.1 47.6,35.1 ; 45.7,36.3 47.7,36.3 ; 50.5,7.4 52.8,7.4 ; 50.6,8.6 52.8,8.6
  lines w0.25: 37.3,8.7 40.2,8.7 ; 37.4,9.9 40.2,9.9
  lines w0.254: 22,11.6 20.3,11.6 20.3,22.1 26,22.1
  text "DHT" at 33.516,36.083 h1.2 r180
  text "PIR" at 47.407,36.083 h1.2 r180
  text "RST" at 56.721,35.5 h2 r270
  text "3V3" at 37.405,34.878 h1.2 r180
  text "5V" at 39.728,34.877 h1.2 r180
  text "3V3" at 51.305,34.878 h1.2 r180
  text "5V" at 53.628,34.877 h1.2 r180
  text "TOP SILKSCREEN" at 68.8,31.482 h2.5
  text "5V" at 22.623,24.176 h1.2 r270
  text "3V3" at 32.795,23.122 h1.2
  text "5V" at 20.471,20.549 h2 r270
  text "GND" at 20.46,16.391 h2 r270
  text "FLASH" at 56.918,13.575 h1.7 r270
  text "3V3" at 51.83,11.691 h1.3
  text "GND" at 43.964,11.685 h1.3
  text "RX" at 46.974,11.685 h1.3
  text "TX" at 49.547,11.685 h1.3
  text "5V" at 31.372,10.123 h1.2
  text "3V3" at 33.695,10.122 h1.2
  text "DOOR" at 37.64,8.98 h1
  text "LED" at 50.834,7.617 h1.2
Bottom Overlay:
  circle w0.2: c59,34.5 r0.7
  circle w0.2: c59,12.5 r0.7
  circle w0.2: c54.5,26 r0.7
  circle w0.2: c48.5,18 r0.7
  circle w0.2: c48.5,20 r0.7
  region: 58.4,10.5 58.4,10.3 59.6,10.3 59.6,10.5
  rectangle: 49.2,17.5 49.6,18.5
  rectangle: 50.3,17.5 50.7,18.6
  rectangle: 50.5,19.4 50.7,20.6
  lines w0.2: 48.5,18.7 50.7,18.7 50.7,17.3 48.6,17.3 ; 48.5,20.7 50.7,20.7 50.7,19.3 48.6,19.3 ; 49.2,17.4 49.2,17.6 ; 49.2,18.4 49.2,18.6 ; 49.2,19.4 49.2,19.6 ; 49.2,20.4 49.2,20.6 ; 53.8,25.9 53.8,23.8 55.2,23.8 55.2,26 ; 53.9,25.3 54.1,25.3 ; 54.9,25.3 55.1,25.3 ; 58.3,12.4 58.3,9.7 59.7,9.7 59.7,12.5 ; 58.3,34.4 58.3,31.4 59.7,31.4 59.7,34.5 ; 58.4,11.8 58.6,11.8 ; 58.4,33.8 58.6,33.8 ; 59.4,11.8 59.6,11.8 ; 59.4,33.8 59.6,33.8
  lines w0.22: 49,17.4 50.6,17.4 ; 49,19.4 50.6,19.4 ; 49.1,18.6 50.6,18.6 ; 49.1,20.6 50.6,20.6 ; 53.9,23.9 53.9,25.5 ; 55.1,23.9 55.1,25.4 ; 58.4,9.8 58.4,12 ; 58.4,31.5 58.4,34 ; 59.6,9.8 59.6,11.9 ; 59.6,31.5 59.6,33.9
  text "Home Assistant - ESPHome Sensors" at 57.143,35.36 h2
  text "E.R 07/24" at 46.36,33.361 h2
  text "RST" at 58.617,31.615 h1.2 r270
  text "BOTTOM SILKSCREEN" at 68.8,27.127 h2.5
  text "EN" at 54.117,23.866 h1.2 r270
  text "15" at 50.382,19.622 h1.2
  text "2" at 50.157,17.615 h1.2
  text "FLS" at 58.617,9.831 h1.2 r270
Top Paste:
  text "TOP PASTE MASK" at 68.8,18.418 h2.5
Bottom Paste:
  text "BOTTOM PASTE MASK" at 68.8,9.709 h2.5
Top Solder:
  text "TOP SOLDER MASK" at 68.8,22.773 h2.5
Bottom Solder:
  text "BOT SOLDER MASK" at 68.8,14.064 h2.5
Board:
  lines w0.2: 0,5 ccw(c5,5) 5,0 25,0 60,0 ccw(c60,5) 65,5 65,40 ccw(c60,40) 60,45 25,45 5,45 ccw(c5,40) 0,40 0,5
  text "BOARD OUTLINE" at 68.8,5.355 h2.5
Route Tool Path:
  lines w2.5: 17.5,0.2 18.8,0.2 cw(c18.8,0) 19,0 ; 17.9,44.8 ccw(c17.9,45) 18.1,45 ; 18.6,14.2 18.6,31.8 ; 25.9,46.4 9.5,46.4 12.2,46.4 cw(c12.2,40) 18.6,40 ; 18.6,5 cw(c12.2,5) 12.2,-1.4 10.4,-1.4 26.8,-1.4 25,-1.4 cw(c25,5) 18.6,5 ; 18.6,5 18.6,7.7 ; 18.6,5 18.6,7.7 ; 18.6,7.7 18.6,7.7 ; 18.6,40 cw(c25,40) 25,46.4 27.7,46.4 ; 18.6,40 18.6,38.2 18.6,40 ; 27.7,46.4 ccw(c27.7,46.4) 27.7,46.4 ; 27.7,46.4 27.7,46.4
  text "ROUTE TOOL PATH - 100 MIL ROUTER" at 68.8,1 h2.5

## Text inside footprints (layer, text, board x,y; h text height)
Designator1: Mechanical 1 "Board Edge" at 20.635,37.159 h0.51 r270
Designator2: Mechanical 1 "Board Edge" at 20.635,13.159 h0.51 r270